# Altium PCB faulhaber.PcbDoc
Units mil, origin at the board's own origin, x right, y up, seen from the top; angles counter-clockwise.
Board outline 8515 x 5415 mil, 2 copper layers (Top Layer, Bottom Layer); 4 components, 32 nets, 74 pads, 3 vias.
Unrouted connection lines stored in the file: 7.
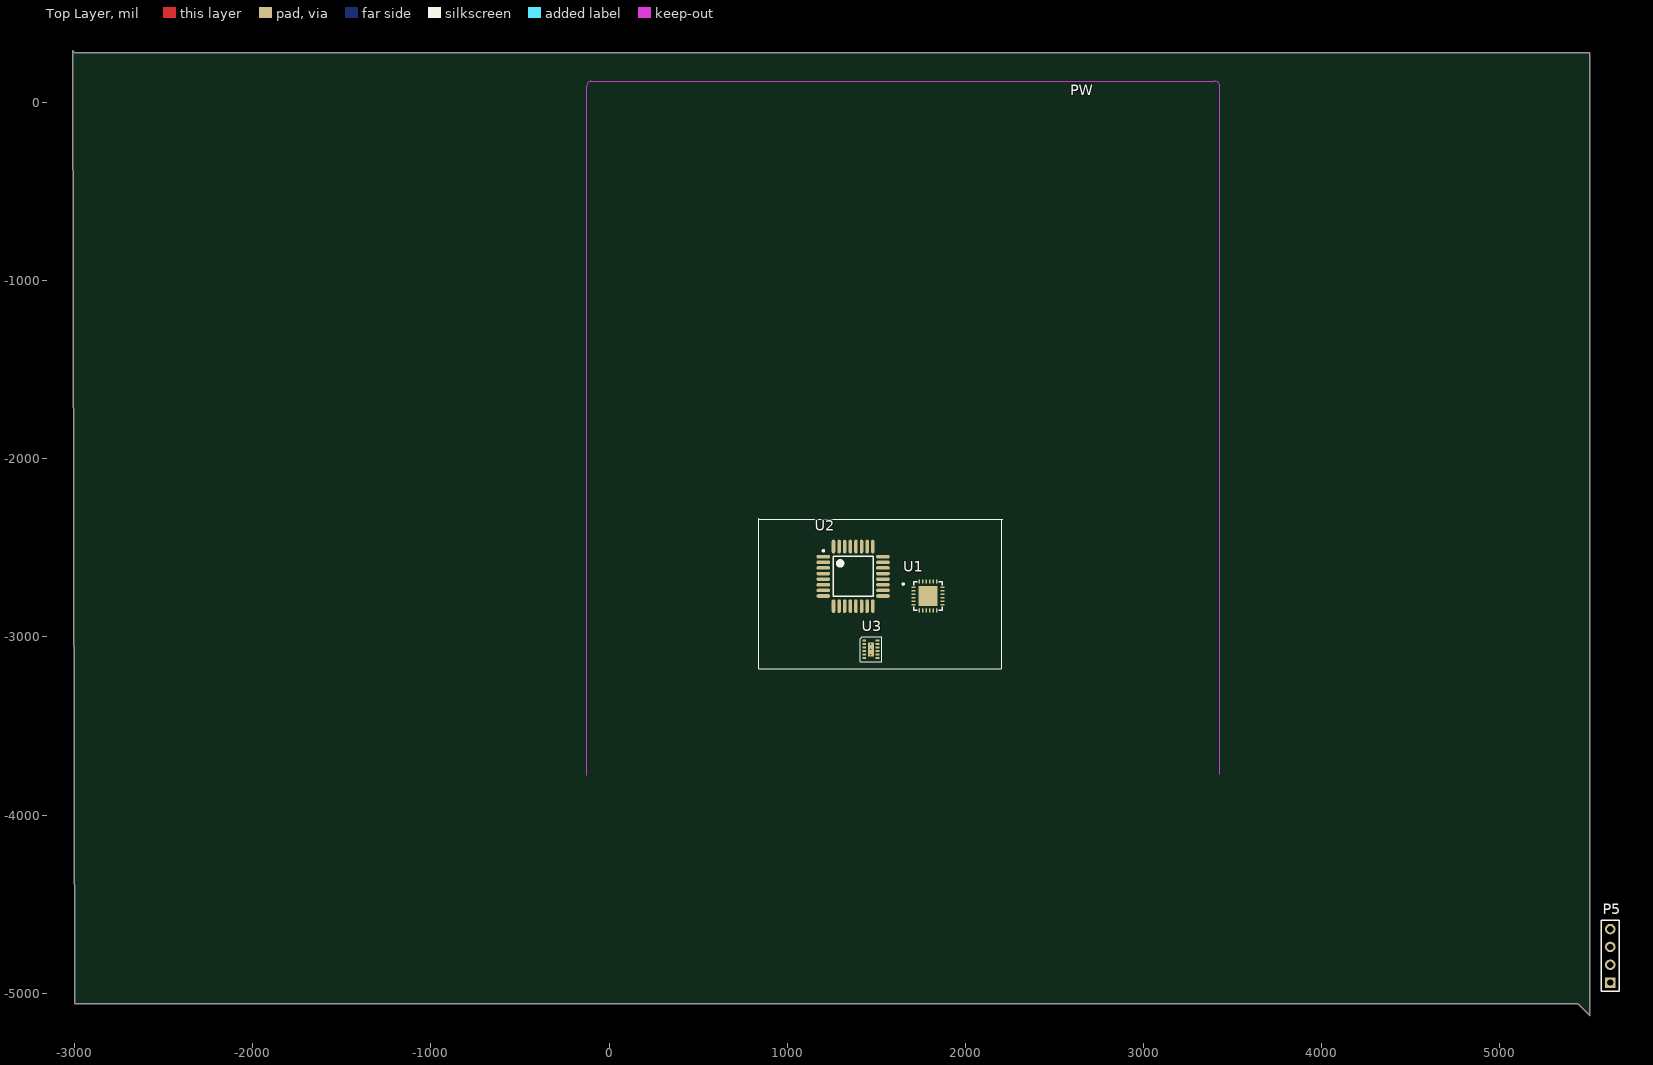
[diagram p0: Top Layer view]
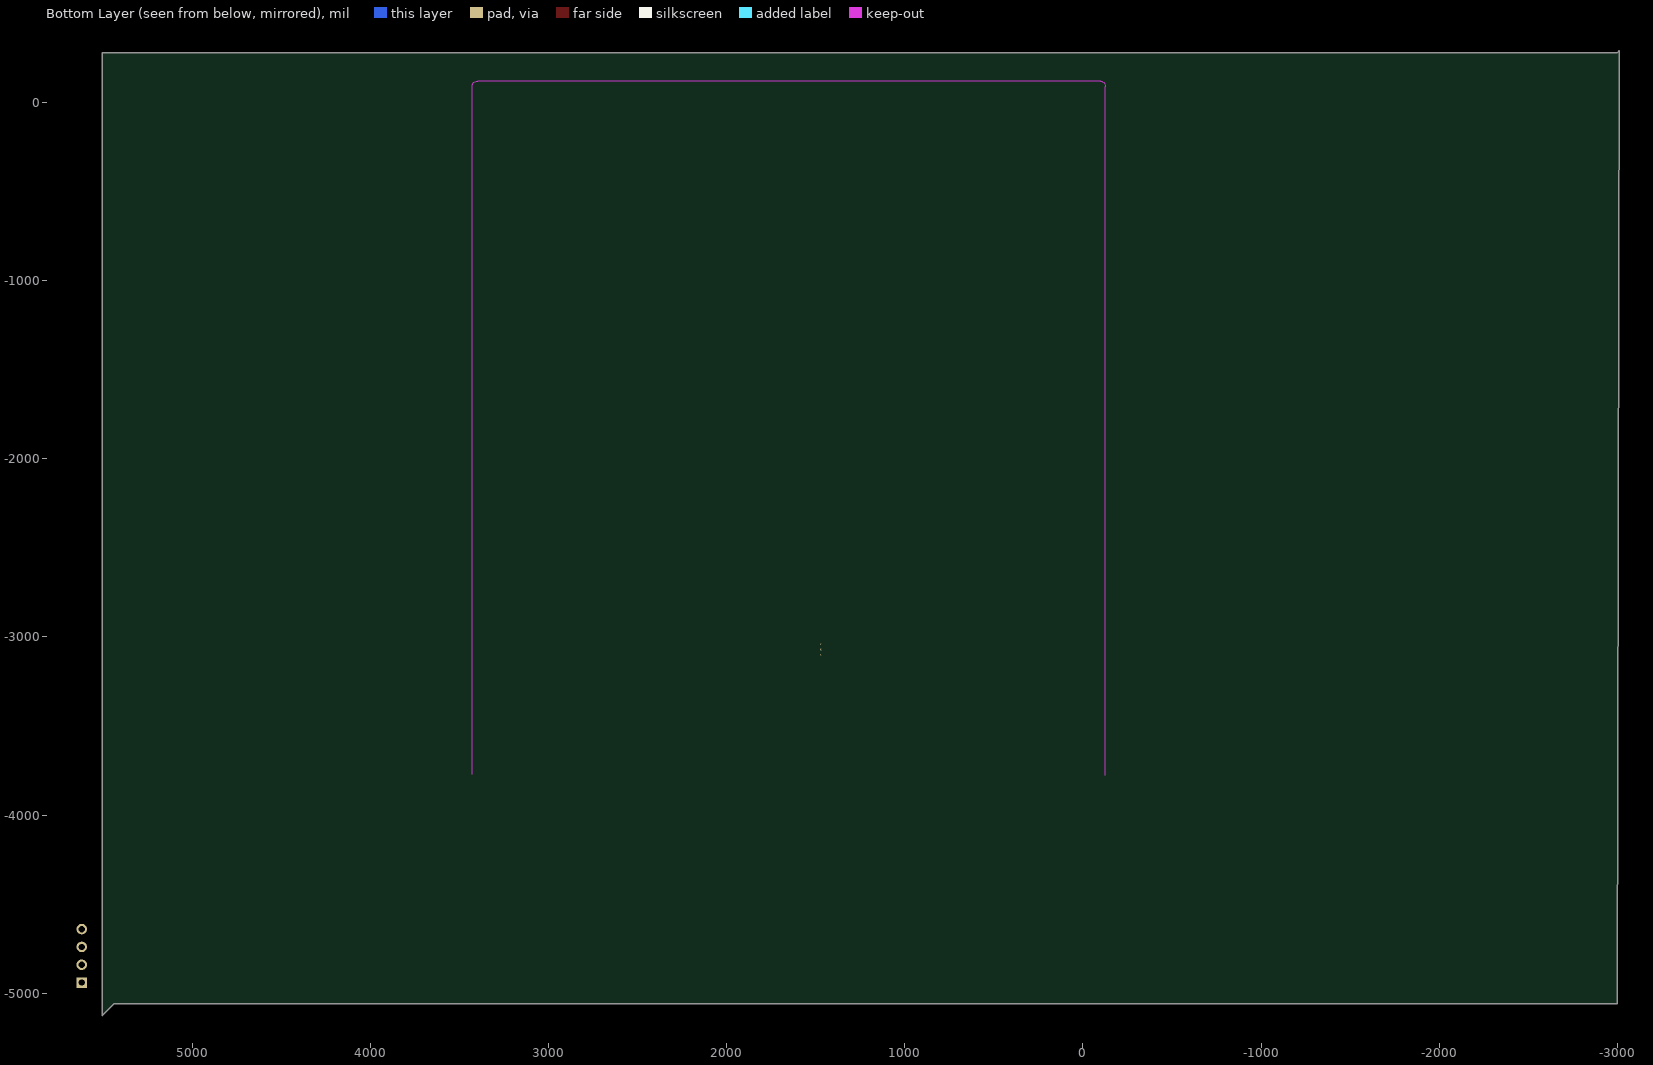
[diagram p1: Bottom Layer view, seen from below]

## Layer stack, top to bottom
Top Layer: signal copper 1.4
Dielectric: dielectric 12.6, FR-4, Dk 4.8
Bottom Layer: signal copper 1.4

## Board outline
-3010,290 -3000,280 5505,280 5505,-5125 5440,-5060 -3000,-5060

## Design rules (kind name [scope] priority, off if disabled: settings)
Clearance Clearance_1 [InPolygon] p1: gap=12
Clearance [All] p2 off: gap=12
ComponentClearance [All] p1 off: gap=10 collisioncheckmode=3 verticalgap=10
HoleSize [All] p1: absolutevalues=TRUE maxlimit=200 minlimit=1 maxpercent=80.000 minpercent=20.000
PolygonConnect [All] p1: connectstyle=Relief reliefconductorwidth=15 reliefentries=4 polygonreliefangle="90 Angle"
RoutingVias [All] p1: holewidth=18 width=29 viastyle="Through Hole" minholewidth=12 minwidth=20 maxholewidth=150 maxwidth=250
SolderMaskExpansion [All] p1: expansion=4
TestPointUsage [All] p1: valid=0 allowmultiple=FALSE
Testpoint [All] p1: side=15 testpointundercomponent=TRUE minsize=40 maxsize=100 preferedsize=60 minholesize=0 maxholesize=40 preferedholesize=32 testpointgrid=1 style=1023 order=0123456789
Width [All] p1: maxlimit=300 minlimit=10 preferedwidth=10 toplayer_prefwidth=12 bottomlayer_prefwidth=12 minimp=50.000000 maximp=50.000000 favimp=50.000000
17 further rules are at their usual default settings.

## Components (designator, comment, footprint, x,y, rotation, side; value= is the part's Value field where it differs from the comment)
P5 "ISP" HDR1X4 5620,-4940 r90 top
U1 "MPU6000" MPU-6000 1790,-2770 r0 top
U2 "ATmega8-16AC" 32A_M 1370,-2660 r0 top
U3 "DRV8836" WSON-8 1470,-3070 r0 top

## Footprints (in the part's own frame and the unit in brackets; to place one, negate y for a bottom-side part, rotate by r counter-clockwise, add the part's x,y. Pads: shape width x height; smd on the part's side, far side on the other; paste and mask are expansions set on the pad)
32A_M [mm] "32-Pin Thin Quad Flat Pack 0.8 mm Pitch, IPC Low Density"
  oval 1.95x0.508 smd: 1(-4.25,2.8) 2(-4.25,2) 3(-4.25,1.2) 4(-4.25,0.4) 5(-4.25,-0.4) 6(-4.25,-1.2) 7(-4.25,-2) 8(-4.25,-2.8) 17(4.25,-2.8) 18(4.25,-2) 19(4.25,-1.2) 20(4.25,-0.4) 21(4.25,0.4) 22(4.25,1.2) 23(4.25,2) 24(4.25,2.8)
  oval 0.508x1.95 smd: 9(-2.8,-4.25) 10(-2,-4.25) 11(-1.2,-4.25) 12(-0.4,-4.25) 13(0.4,-4.25) 14(1.2,-4.25) 15(2,-4.25) 16(2.8,-4.25) 25(2.8,4.25) 26(2,4.25) 27(1.2,4.25) 28(0.4,4.25) 29(-0.4,4.25) 30(-1.2,4.25) 31(-2,4.25) 32(-2.8,4.25)
  silkscreen extent -4.37,-2.85 2.85,3.77, body extent -3.5,-3.5 3.5,3.5, height 1.2
HDR1X4 [mm] "Connector; Header; 4 Position"
  rect 1.5x1.5 hole 0.9: 1(0,0)
  round 1.5 hole 0.9: 2(2.54,0) 3(5.08,0) 4(7.62,0)
  silkscreen extent -1.27,-1.27 8.89,1.27
MPU-6000 [mm] "QFN, 24-Leads, Body 4.1x4.1mm (max), Pitch 0.50mm, IPC Medium Density"
  oval 0.6x0.25 smd: 1(-2.05,1.25) 2(-2.05,0.75) 3(-2.05,0.25) 4(-2.05,-0.25) 5(-2.05,-0.75) 6(-2.05,-1.25) 13(2.05,-1.25) 14(2.05,-0.75) 15(2.05,-0.25) 16(2.05,0.25) 17(2.05,0.75) 18(2.05,1.25)
  oval 0.25x0.6 smd: 7(-1.25,-2.05) 8(-0.75,-2.05) 9(-0.25,-2.05) 10(0.25,-2.05) 11(0.75,-2.05) 12(1.25,-2.05) 19(1.25,2.05) 20(0.75,2.05) 21(0.25,2.05) 22(-0.25,2.05) 23(-0.75,2.05) 24(-1.25,2.05)
  rect 2.7x2.8 smd: 25(0,0)
  silkscreen extent -3.65,-2.05 2.05,2.05, body extent -2.05,-2.05 2.05,2.05, height 0.95
WSON-8 [mm]
  rect 0.55x0.3 smd: 1(-0.95,1.25) 2(-0.95,0.75) 3(-0.95,0.25) 4(-0.95,-0.25) 5(-0.95,-0.75) 6(-0.95,-1.25) 7(0.95,-1.25) 8(0.95,-0.75) 9(0.95,-0.25) 10(0.95,0.25) 11(0.95,0.75) 12(0.95,1.25)
  rect 0.9x2 smd: 13(0,0)
  silkscreen extent -1.52,-1.78 1.52,1.78

## Part data
P5: library part "Header 4", "Header, 4-Pin"
U1: library part MPU-6000
U2: "8-Bit AVR Microcontroller with 8K Bytes of In-System Programmable Flash Memory"

## Via types
v1: diameter 9.84, hole 7.87, Top Layer to Bottom Layer, 3 vias

## Nets (pads, with @x,y where several pads share a name; then routed paths per layer and width w, separated by ;. In a path a pad name is that pad's centre, name@x,y a point inside that pad or via, vN(x,y) a via of type N, cw(c..) or ccw(c..) an arc to the next point about the centre after c; other vN are vias at no path point)
+5V: U2.4 U2.6
AD1H: 
AD2H: 
BD1H: 
BD2H: 
BEEP: U2.9
CSA: U2.22
DGND: U2.3 U2.5 U2.21
DOG: U2.10
DR-A: U2.30
DR-B: U2.31
FAN: U2.11
MISO: P5.3 U2.16
MOSI: P5.2 U2.15
NetC2_1: U2.7
NetC3_1: U2.8
NetC5_1: U2.20
NetL1_1: U2.24
NetL2_1: U2.23
NetL3_1: U2.25
NetL4_1: U2.26
NetL5_2: U2.32
NetL6_2: U2.1
NetL7_1: U2.18
PWM-A: U2.14
PWM-B: U2.13
RST: P5.1 U2.29
S1: 
S2: 
SCK: P5.4 U2.17
TEMP: U2.28
VSA: U2.19
pads on no net: U1.1 U1.2 U1.3 U1.4 U1.5 U1.6 U1.7 U1.8 U1.9 U1.10 U1.11 U1.12 U1.13 U1.14 U1.15 U1.16 U1.17 U1.18 U1.19 U1.20 U1.21 U1.22 U1.23 U1.24 U1.25 U2.2 U2.12 U2.27 U3.1 U3.2 U3.3 U3.4 U3.5 U3.6 U3.7 U3.8 U3.9 U3.10 U3.11 U3.12 U3.13
copper on no net:
  other v1: 1470,-3099.53 1470,-3070 1470,-3040.47

## Keep-outs
Keep-Out Layer:
  lines w6: -125,-3775 -125,89 cw(c-97.5,91.5) -100,119 3398,119 cw(c3400.5,91.5) 3428,94 3428,-3772

## Silkscreen, mask and mechanical layers (free items; w line width, h text height)
Top Overlay:
  lines w5.91: 840,-2340 2210,-2340 ; 840,-2335 840,-3180 2200,-3180 ; 2205,-3180 2205,-2340
  text "PW" at 2590,40 h60